# Altium PCB PCB1.PcbDoc (part 1 of 3)
Units mil, origin at the board's own origin, x right, y up, seen from the top; angles counter-clockwise.
Board outline 2406.58 x 2514.76 mil, 4 copper layers (Top Layer, GND1, GND2, Bottom Layer), stack 22.334 mil thick; 96 components, 76 nets, 372 pads, 263 vias.
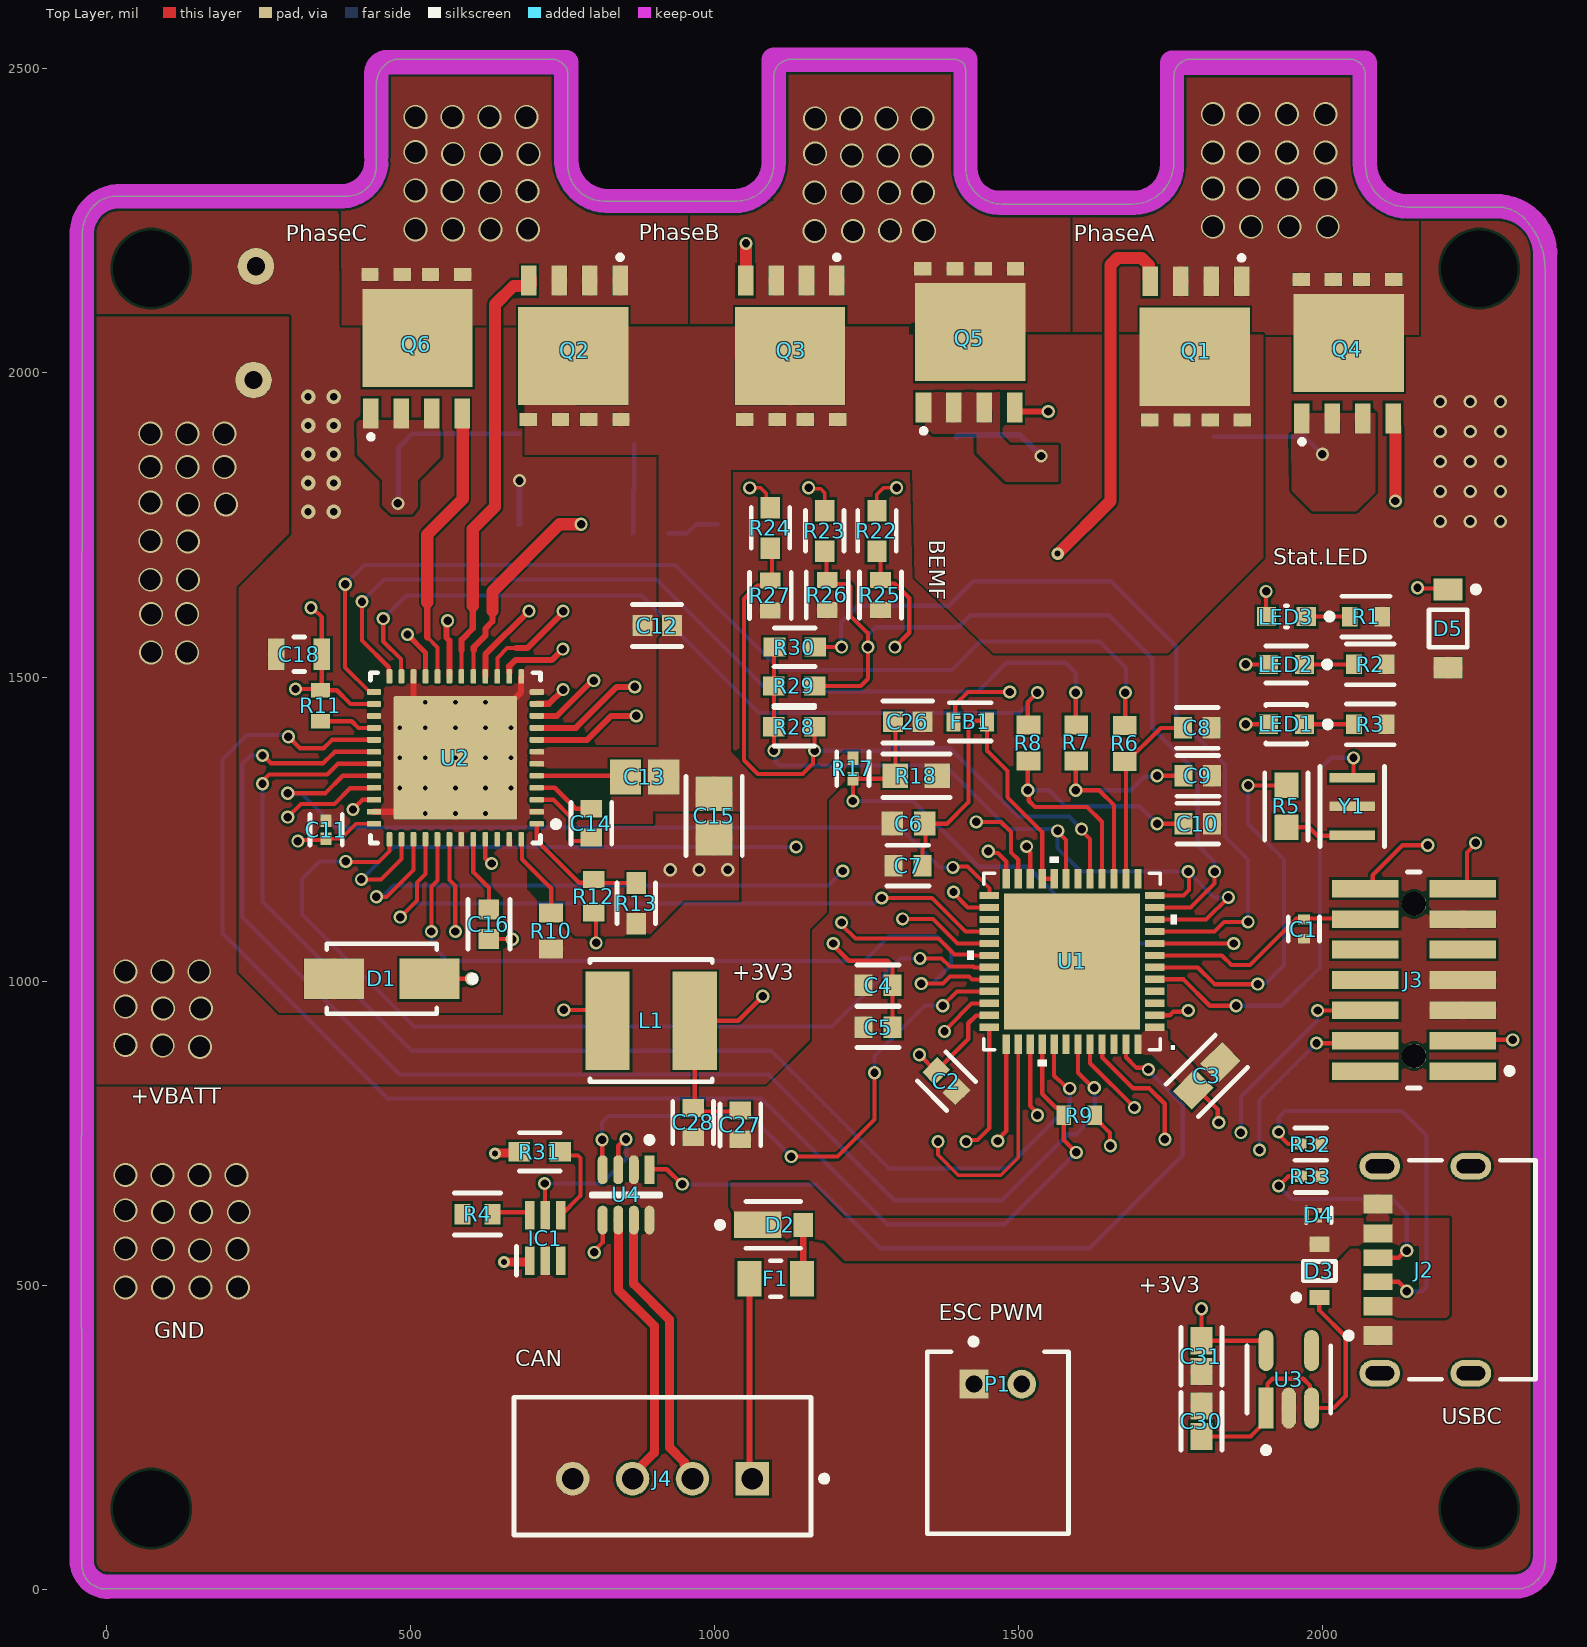
[diagram p0: Top Layer view]
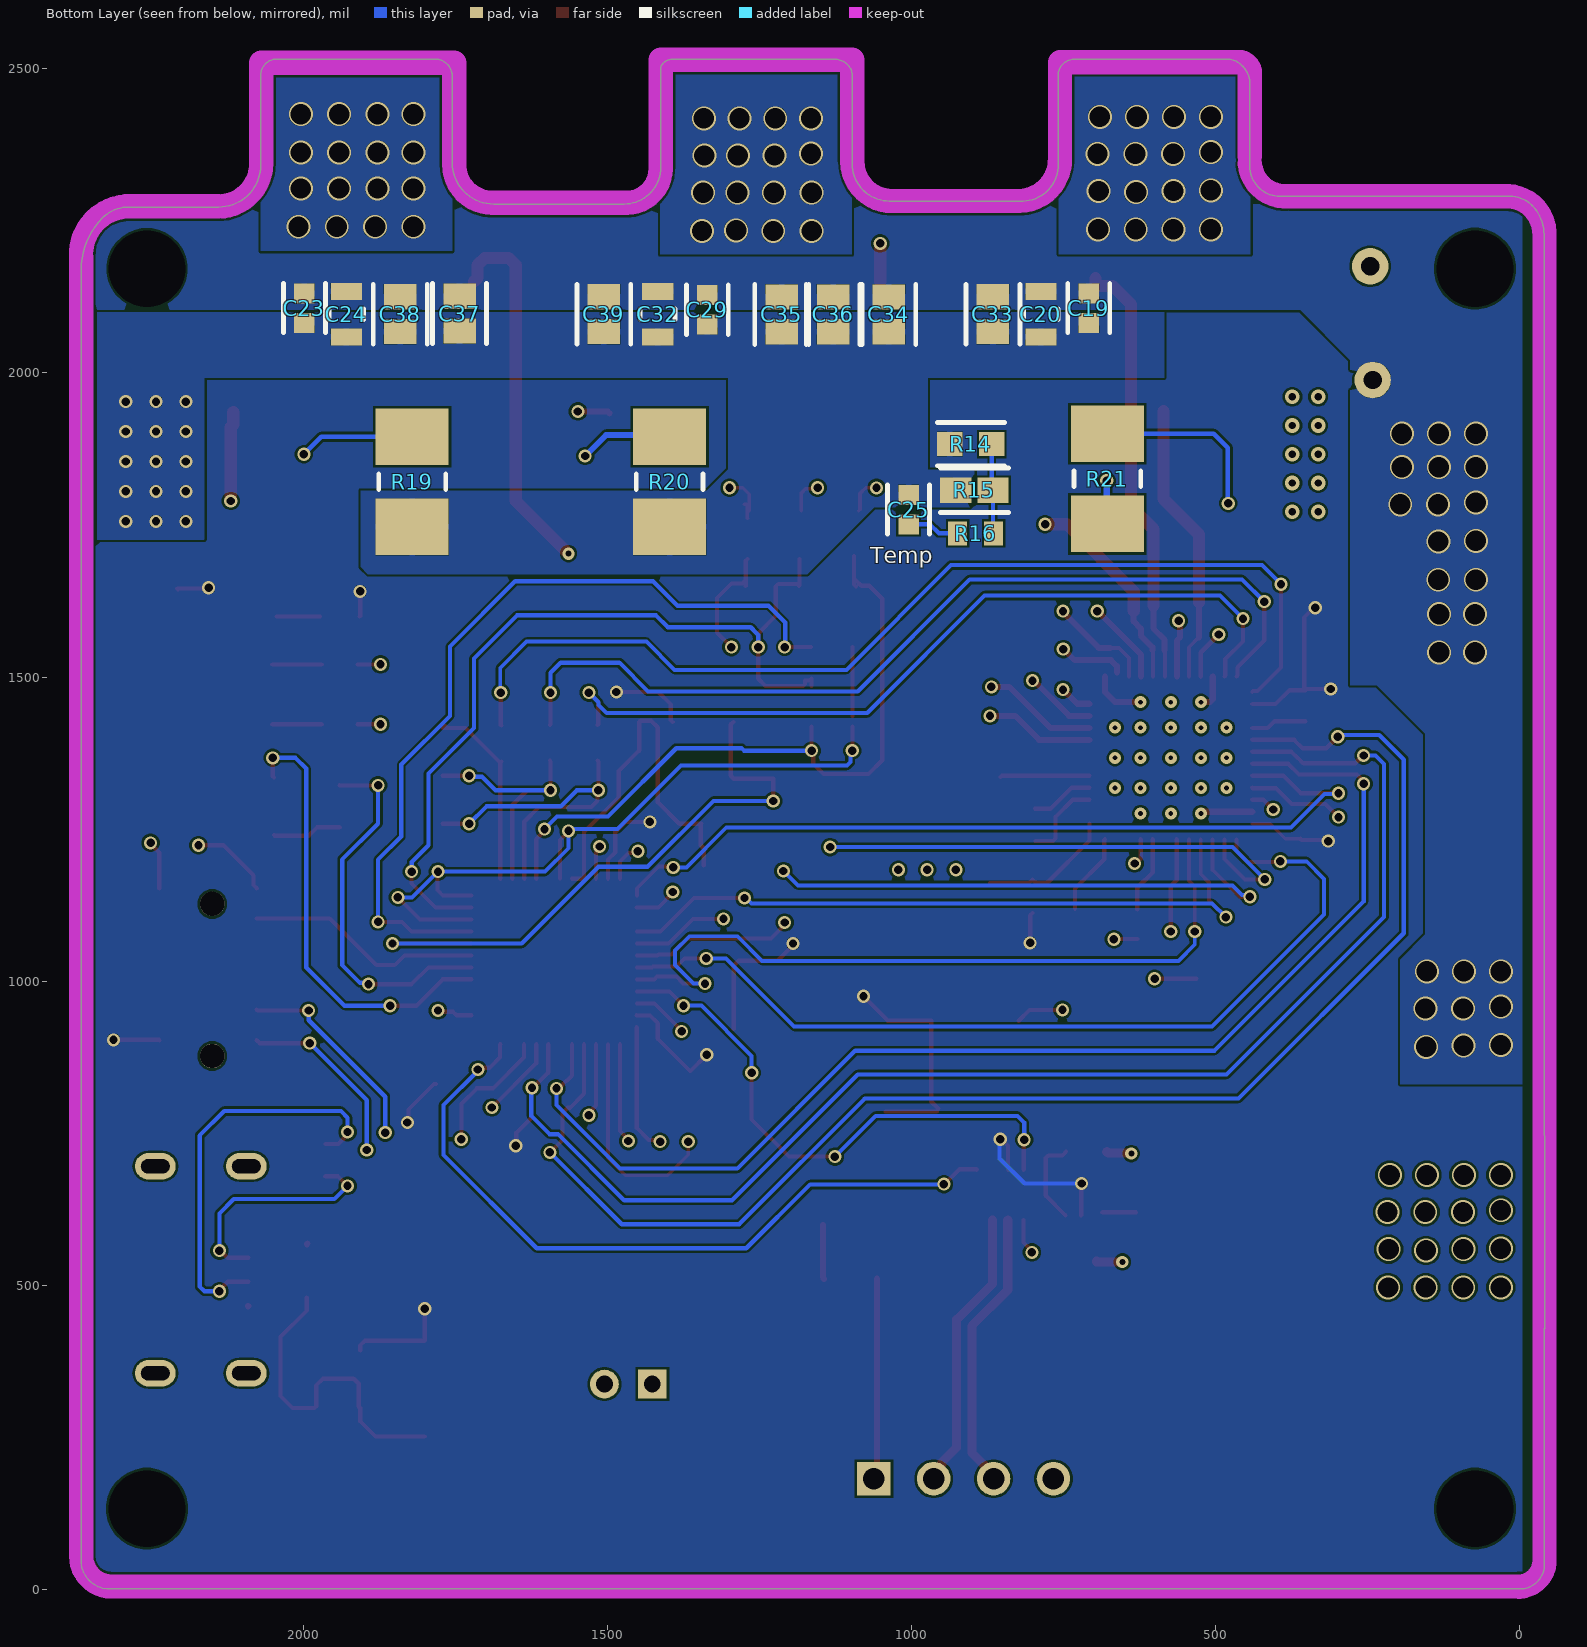
[diagram p1: Bottom Layer view, seen from below]
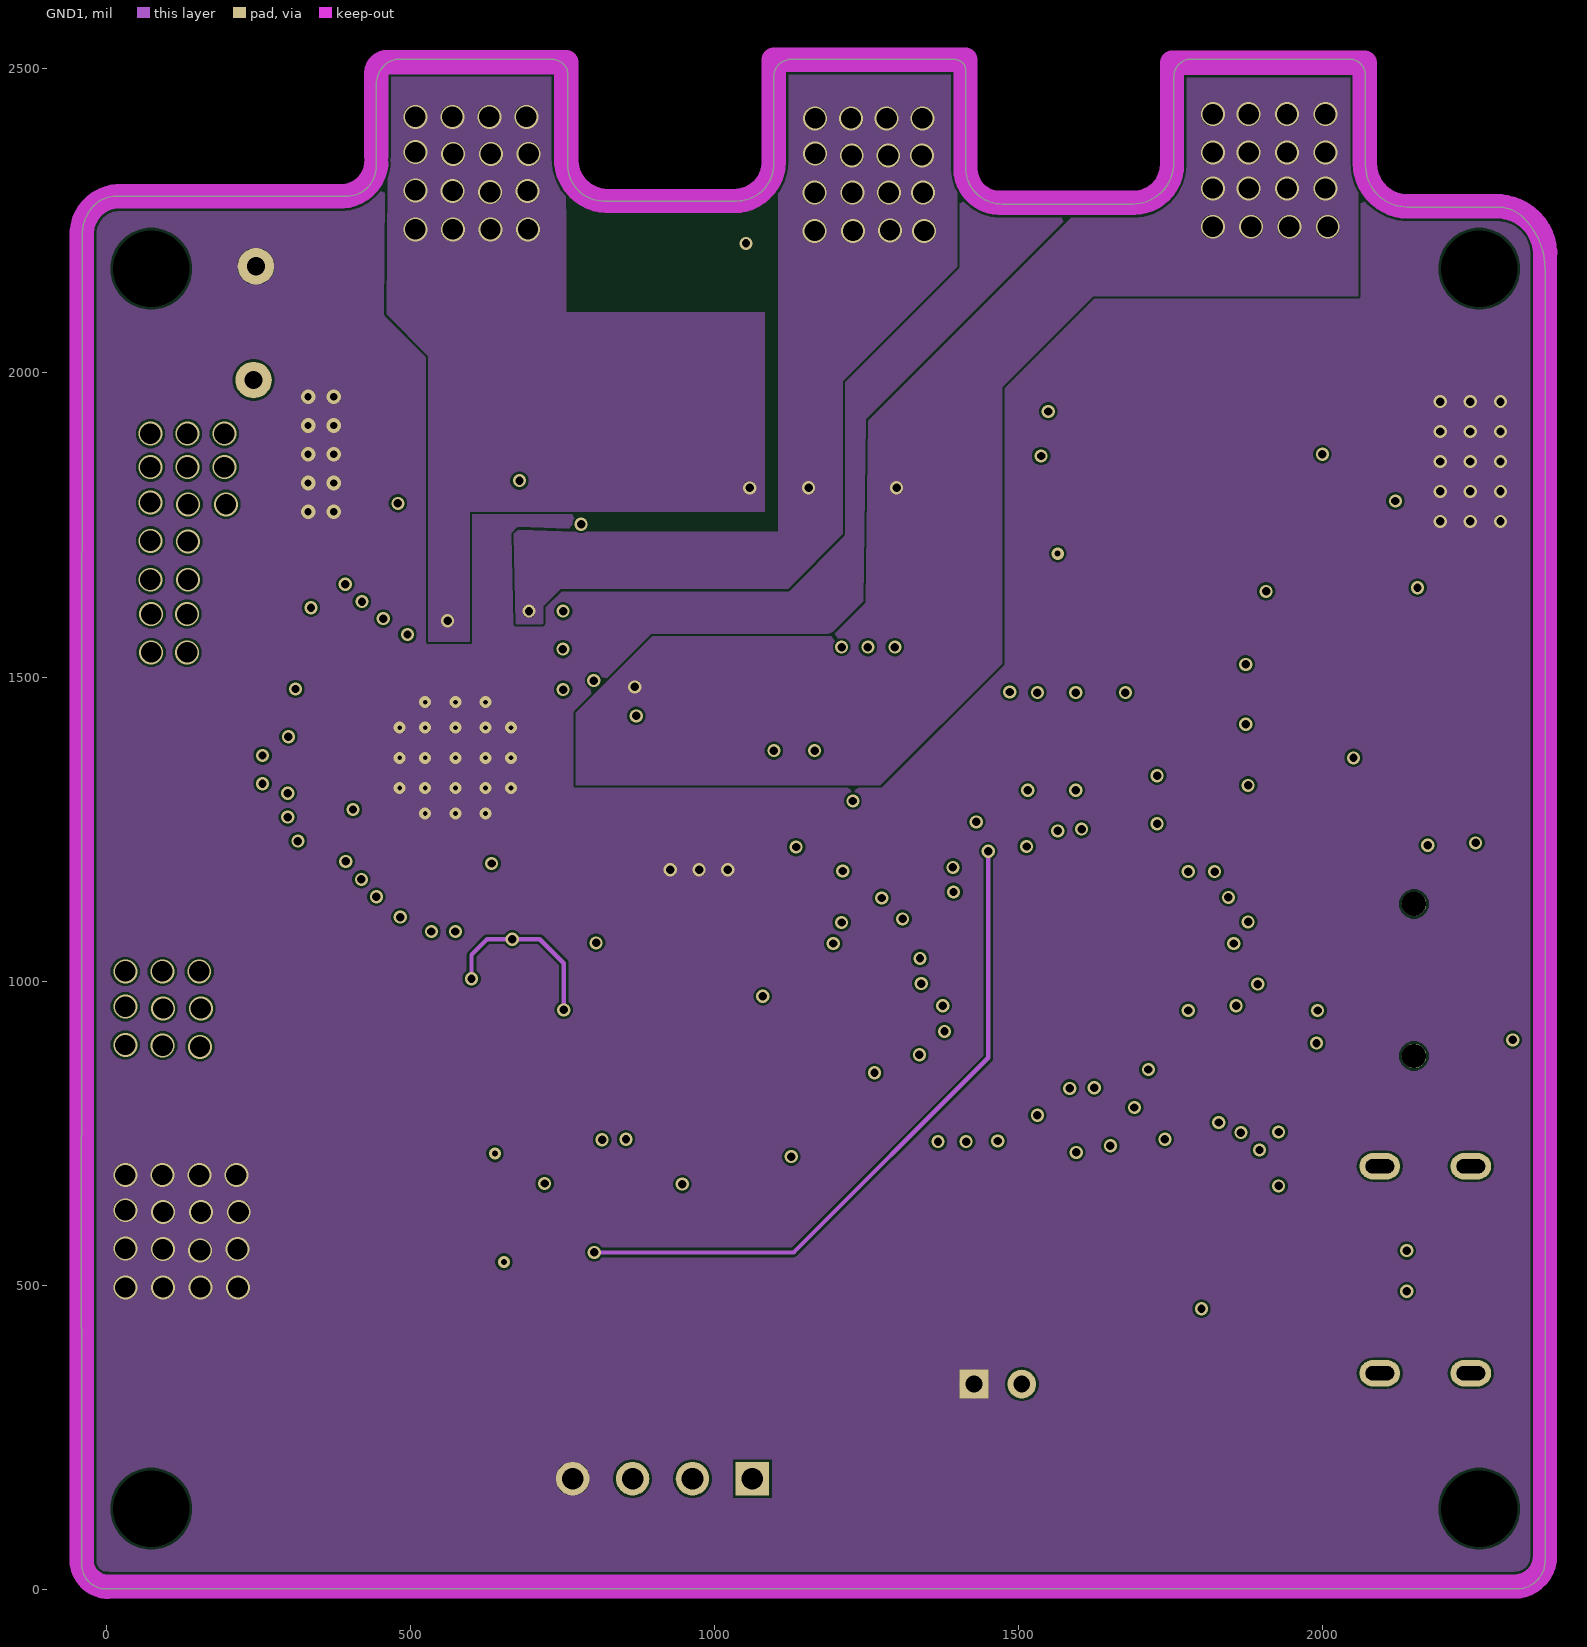
[diagram p2: GND1]
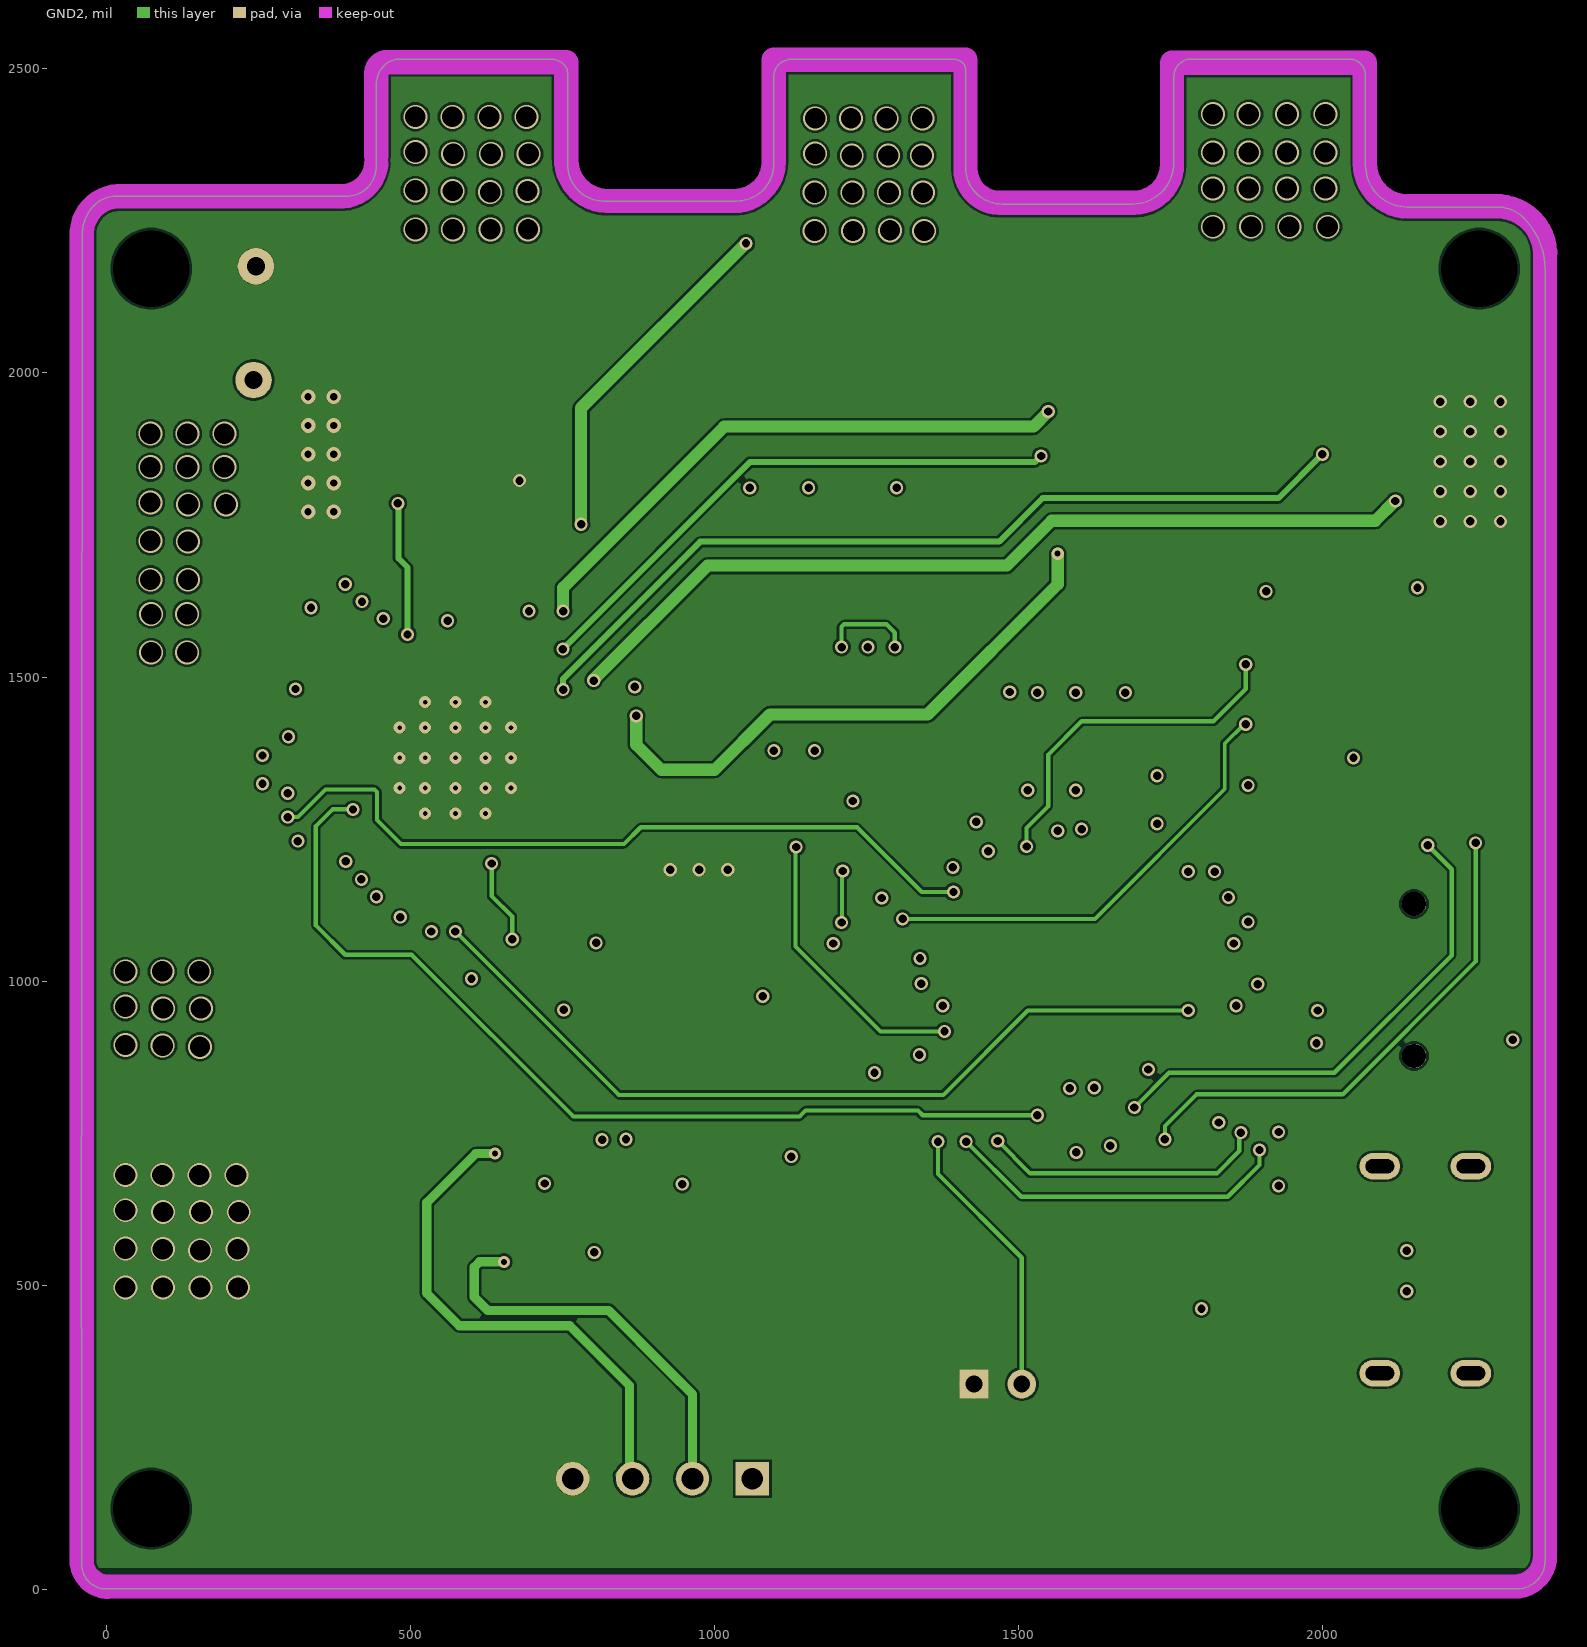
[diagram p3: GND2]

## Layer stack, top to bottom
Top Solder: solder mask 0.4, Solder Resist, Dk 3.5
Top Layer: signal copper 0.689
Dielectric 2: prepreg 2.8, PP-006, Dk 4.1
GND1: signal copper 1.378
Dielectric 1: dielectric 12.6, FR-4, Dk 4.8
GND2: signal copper 1.378
Dielectric 5: prepreg 2.8, PP-006, Dk 4.1
Bottom Layer: signal copper 0.689
Bottom Solder: solder mask 0.4, Solder Resist, Dk 3.5

## Board outline
-40.35,40.97 -40.35,429.48 -41.43,429.48 -41.13,430.75 -41.13,745.71 -40.35,747.05 -40.35,1239.17 -39.81,2173.04 -39.81,2227 cw(c28.91,2227) -19.68,2275.59 cw(c15.96,2239.95) 15.96,2290.35 394.68,2290.35 ccw(c394.68,2339.57) 443.9,2339.57 443.9,2475.42 cw(c484.22,2475.42) 455.71,2503.94 457.78,2506 cw(c481.3,2482.48) 481.3,2515.75 730.58,2515.75 cw(c730.58,2485.5) 751.97,2506.89 cw(c735.34,2490.26) 758.86,2490.26 758.86,2337.6 ccw(c817.91,2341.54) 821.85,2282.48 1036.42,2282.48 ccw(c1036.42,2343.5) 1097.44,2343.5 1097.44,2488.15 cw(c1123.68,2488.15) 1105.13,2506.7 cw(c1126.97,2484.86) 1126.97,2515.75 1381.5,2515.65 1392.07,2515.65 cw(c1392.07,2492.47) 1408.46,2508.86 cw(c1398.96,2499.35) 1412.4,2499.35 1412.4,2337.6 ccw(c1472.44,2337.6) 1472.44,2277.56 1687.01,2277.56 ccw(c1687.01,2345.47) 1754.92,2345.47 1754.92,2439.96 1754.92,2486.22 cw(c1783.46,2487.2) 1782.48,2515.75 2042.32,2515.75 cw(c2043.31,2489.17) 2069.88,2490.16 2069.88,2341.54 ccw(c2138.78,2341.54) 2138.78,2272.64 2286.84,2272.64 cw(c2286.84,2211.88) 2329.8,2254.84 cw(c2244.45,2169.49) 2365.16,2169.49 2365.16,2046.26 2365.16,176.18 2365.16,47.24 cw(c2318.9,47.24) 2318.9,0.98 -0.37,0.98 cw(c-0.37,40.97)

## Design rules (kind name [scope] priority, off if disabled: settings)
Clearance Clearance_1 [All] p1: gap=3.94 ignorepadtopadclearanceinfootprint=FALSE
Clearance "Via to Via" [All] p2: gap=3.94 ignorepadtopadclearanceinfootprint=FALSE
DiffPairsRouting [All] p1: maxlimit=10 minlimit=10 mostfreqgap=10 toplayer_minwidth=15 toplayer_maxwidth=15 toplayer_prefwidth=15 midlayer1_minwidth=15 midlayer1_maxwidth=15 midlayer1_prefwidth=15 midlayer2_minwidth=15 midlayer2_maxwidth=15 midlayer2_prefwidth=15 bottomlayer_minwidth=15 bottomlayer_maxwidth=15 bottomlayer_prefwidth=15 maxuncoupledlength=500
HoleSize [All] p1: absolutevalues=TRUE maxlimit=130 minlimit=1 maxpercent=80.000 minpercent=20.000
MinimumSolderMaskSliver [All] p1: minsoldermaskwidth=3.94
PlaneConnect [All] p1: planeconnectstyle=Direct reliefexpansion=20 reliefentries=4 reliefconductorwidth=10 reliefairgap=10
PolygonConnect PolygonConnect_GND [InNet('AGND') vs InNet('AGND')] p1: thpad.connectstyle=Relief thpad.reliefconductorwidth=10 thpad.reliefentries=4 thpad.polygonreliefangle="90 Angle" thpad.airgapwidth=10 smdpad.connectstyle=Relief smdpad.reliefconductorwidth=10 smdpad.reliefentries=4 smdpad.polygonreliefangle="90 Angle" smdpad.airgapwidth=10 via.connectstyle=Direct via.reliefconductorwidth=10 via.reliefentries=4 via.polygonreliefangle="90 Angle" via.airgapwidth=10
RoutingVias [InNet('PHASE A')  OR InNet('PHASE B') OR InNet('PHASE C')] p1: holewidth=33.46 width=39.37 viastyle="Through Hole" minholewidth=28 minwidth=30 maxholewidth=35 maxwidth=50
SilkToSolderMaskClearance [IsPad] p1: minsilkscreentomaskgap=3 clearancetoexposedcopper=TRUE
SolderMaskExpansion [All] p1: expansion=4.02 istentingtop=FALSE
SupplyNets "Schematic Supply Nets" [InNet('+VBATT')] p1: voltage=0.000
SupplyNets "Schematic Supply Nets_1" [InNet('GND')] p2: voltage=0.000
SupplyNets "Schematic Supply Nets_4" [InNet('+3V3')] p3: voltage=0.000
Width "Gate Drive Signal_2" [(InNet('SPA') OR InNet('SPB') OR InNet('SPC'))] p1: maxlimit=10 minlimit=6 preferedwidth=8
Width VBus [InNet('VBUS')] p2: maxlimit=30 minlimit=10 preferedwidth=20
Width "Gate Drive Signal Width" [(InNet('GHA') OR InNet('GLA') OR InNet('GHB') OR InNet('GLB') OR InNet('GHC') OR InNet('GLC'))] p3: maxlimit=22 minlimit=6 preferedwidth=20 minimp=50.000000 maximp=50.000000 favimp=50.000000
Width "Signal Widths" [(InNet('CAN_TX') OR InNet('CAN_RX') OR InNet('GPIO PB11') OR InNet('GPIO PB13') OR InNet('GPIO PC10') OR InNet('GPIO PA6') OR InNet('SCLK') OR InNet('SDI') OR InNet('SDO') OR InNet('GPIO PB12') OR InNet('ESC PWM/TIM2_CH1') OR InNet('SWCLK') OR InNet('SWDIO') OR InNet('ADC1 IN2 / COMP1 INP') OR InNet('ADC1 IN4 / COMP2 INP') OR InNet('ADC1 IN15 / COMP4 INP') OR InNet('ADC1 IN3/COMP2 INM') OR InNet('SOA') OR InNet('SOB') OR InNet('SOC') OR InNet('VBUS Sense') OR InNet('Therm') OR InNet('TIM1 CH1') OR InNet('TIM1 CH2') OR InNet('TIM1 CH3') OR InNet('TIM1 CH1N') OR InNet('TIM1 CH2N') OR InNet('TIM1 CH3N') OR InNet('UART1 RX') OR InNet('UART1 TX') OR InNet('STATUS1') OR InNet('STATUS2') Or InNet('ESC_NRST') OR InNet('+3V3'))] p4: maxlimit=10 minlimit=5.5 preferedwidth=7
25 further rules are at their usual default settings.

## Classes and differential pairs
component class USB: C30 C31 D3 D4 J2 R32 R33 U3
component class "Gate Drive": C11 C12 C13 C14 C15 C16 C18 C19 C20 C23 C24 C29 C32 D1 L1 Q1 Q2 Q3 Q4 Q5 Q6 R9 R10 R11 R12 R13 R19 R20 R21 U2
component class Sensors: C25 C26 R14 R15 R16 R17 R18 R22 R23 R24 R25 R26 R27 R28 R29 R30
component class MCU: C1 C2 C3 C4 C5 C6 C7 C8 C9 C10 C33 C34 C35 C36 C37 C38 C39 D5 FB1 J1 J3 LED1 LED2 LED3 P1 R1 R2 R3 R4 R5 R6 R7 R8 U1 Y1
component class CAN: C27 C28 D2 F1 IC1 IC? J4 R31 U4
differential pair CAN: +CAN_P -CAN_N

## Components (designator, comment, footprint, x,y, rotation, side; value= is the part's Value field where it differs from the comment)
C1 "100nF 0402" FP-GRM155-0_05-MFG 1968.5,1085.63 r270 top
C2 "0.1uF 25V X7R 0603" FP-C0603C-CF-MFG 1380.91,835.63 r315 top value="0.10 μF"
C3 "4.7uF 16V X7R 0603" FP-GRM188-0_2-IPC_A 1809.06,844.49 r45 top
C4 "0.1uF 25V X7R 0603" FP-C0603C-CF-MFG 1268.7,993.11 r180 top value="0.10 μF"
C5 "0.1uF 25V X7R 0603" FP-C0603C-CF-MFG 1268.7,924.21 r180 top value="0.10 μF"
C6 "1uF X7R 25V 0603" CAPC1608X95X35NL15T15 1318.9,1258.86 r0 top
C7 "10nF C0G 25V 0603" FP-C0603C-CF-MFG 1317.91,1189.96 r180 top value="10,000 pF"
C8 "1nF 50V X7R 0603" FP-C0603C-CF-MFG 1793.31,1416.34 r0 top value="1,000 pF"
C9 "1nF 50V X7R 0603" FP-C0603C-CF-MFG 1794.29,1337.6 r0 top value="1,000 pF"
C10 "1nF 50V X7R 0603" FP-C0603C-CF-MFG 1794.29,1258.86 r180 top value="1,000 pF"
C11 "1uF X7R 6.3V 0402" FP-GRT155-0_05-IPC_C 361.22,1249.02 r270 top
C12 "0.1uF X7R 50V 0603" FP-0603B104K500CT-IPC_C 905.51,1584.65 r0 top
C13 "1uF X7R 16 V 0805" CAPC2013X140X50NL20T25 884.84,1335.63 r180 top
C14 "47nF X7R 25V 0603" FP-C0603C-CF-MFG 797.24,1259.84 r270 top value="47,000 pF"
C15 "10uF X5R 50V 0805" FP-GRM21B-0_2-e0_2_0_7-IPC_A 999.09,1271.71 r270 top
C16 "0.1uF X7R 50V 0603" FP-0603B104K500CT-IPC_C 628.94,1093.5 r270 top
C18 "22uF X7R 10V 0805" FP-GRM21B-0_2-e0_2_0_7-MFG 316.93,1537.4 r180 top
C19 "0.1uF X7R 50V 0603" FP-0603B104K500CT-IPC_C 708.66,2106.3 r270 bottom
C20 "4.7uF X7R 50V 0805" FP-GRM21B-0_2-e0_2_0_7-MFG 787.4,2096.46 r270 bottom
C23 "0.1uF X7R 50V 0603" FP-0603B104K500CT-IPC_C 1998.03,2106.3 r270 bottom
C24 "4.7uF X7R 50V 0805" FP-GRM21B-0_2-e0_2_0_7-MFG 1929.13,2096.46 r270 bottom
C25 "0.1uF X7R 50V 0603" FP-0603B104K500CT-IPC_C 1004.92,1775.15 r270 bottom
C26 "0.1uF X7R 50V 0603" FP-0603B104K500CT-IPC_C 1317.37,1426.18 r180 top
C27 "0.1uF 25V X7R 0603" FP-C0603C-CF-MFG 1042.32,763.78 r270 top value="0.10 μF"
C28 "0.1uF 25V X7R 0603" FP-C0603C-CF-MFG 964.57,767.72 r270 top value="0.10 μF"
C29 "0.1uF X7R 50V 0603" FP-0603B104K500CT-IPC_C 1335.75,2103.67 r270 bottom
C30 "C1608X5R1H105K080AB" FP-C1608-080-0_1-IPC_B 1800.2,276.57 r270 top
C31 "C1608X5R1H105K080AB" FP-C1608-080-0_1-IPC_B 1800.2,383.62 r90 top
C32 "4.7uF X7R 50V 0805" FP-GRM21B-0_2-e0_2_0_7-MFG 1417.32,2096.46 r270 bottom
C33 "4.7uF X7R 50V 0805" FP-GRM21B-0_2-e0_2_0_7-IPC_C 866.14,2096.46 r270 bottom
C34 "4.7uF X7R 50V 0805" FP-GRM21B-0_2-e0_2_0_7-IPC_C 1037.28,2096.15 r270 bottom
C35 "4.7uF X7R 50V 0805" FP-GRM21B-0_2-e0_2_0_7-IPC_C 1213.46,2096.15 r270 bottom
C36 "4.7uF X7R 50V 0805" FP-GRM21B-0_2-e0_2_0_7-IPC_C 1128.81,2096.15 r270 bottom
C37 "4.7uF X7R 50V 0805" FP-GRM21B-0_2-e0_2_0_7-IPC_C 1743.11,2097.32 r270 bottom
C38 "4.7uF X7R 50V 0805" FP-GRM21B-0_2-e0_2_0_7-IPC_C 1840.55,2096.46 r270 bottom
C39 "4.7uF X7R 50V 0805" FP-GRM21B-0_2-e0_2_0_7-IPC_C 1505.91,2096.46 r270 bottom
D1 "60V 1A" FP-SMA-MFG 452.76,1003.94 r180 top
D2 "NRVBSS16HE" FP-477AD-MFG 1096.46,599.41 r0 top
D3 "NSR0320MW2T1G" ONSC-SOD-323-2-477-02_V 1994.09,523.62 r90 top
D4 "PESD3V3Y1BSFYL" FP-SOD962-2-CA-MFG 1993.11,615.08 r270 top
D5 "MMSZ4685T1G" ONSC-SOD-123-2-425-04_V 2205.71,1579.72 r270 top
F1 "300mA" FP-0805L010-MFG 1100.39,510.83 r0 top
FB1 "600@100MHz" FP-MPZ1608-0_8-MFG 1420.28,1426.18 r180 top
IC1 "74LVC1G3157GW-Q10H" SOT65P210X110-6N 721.54,577.6 r90 top
J2 "217175-0001" FP-217175-0001-MFG 2209.65,525.59 r90 top
J3 "FTSH-107-01-L-DV-K-A" FP-FTSH-107-01-L-DV-K-A-MFG 2149.61,1001.97 r90 top
J4 "B4B-XH-A(LF)(SN)" FP-B4B-XH-A_LF_SN-MFG 914.37,202.76 r0 top
L1 "22μH 1500mA 2020" FP-LQH5BPN_38-MFG 895.67,935.04 r0 top
LED1 "ORANGE" FP-6_541-5092_01-4-MFG 1939.96,1422.24 r180 top
LED2 "GREEN" FP-LTST-C193KGKT-5A-MFG 1939.96,1520.67 r180 top
LED3 "BLUE" FP-APT1608QBC-D-MFG 1939.96,1599.41 r180 top
P1 "S2B-PH-K-S(LF)(SN)" JST-S2B-PH-K-S_V 1465.55,241.14 r0 top
Q1 "STL130N6F7" FERD20U50DJFTR 1787.4,2153.54 r180 top
Q2 "STL130N6F7" FERD20U50DJFTR 765.75,2154.53 r180 top
Q3 "STL130N6F7" FERD20U50DJFTR 1122.05,2154.53 r180 top
Q4 "STL130N6F7" FERD20U50DJFTR 2044.29,1922.24 r0 top
Q5 "STL130N6F7" FERD20U50DJFTR 1422.24,1939.96 r0 top
Q6 "STL130N6F7" FERD20U50DJFTR 513.78,1930.12 r0 top
R1 "330 O 5% 0603" FP-AC0603-IPC_C 2070.8,1599.41 r180 top
R2 "AC0603JR-07330RL" FP-AC0603-IPC_C 2077.76,1520.67 r180 top
R3 "AC0603JR-07330RL" FP-AC0603-IPC_C 2077.76,1422.24 r180 top
R4 "0 O 0603" FP-MCT0603-IPC_C 610.24,617.13 r0 top
R5 "220 O 1% 0603" FP-AC0603-IPC_A 1939.96,1287.4 r270 top
R6 "100 O 0603 1%" RESC1608X55X25ML10T15 1674.21,1390.75 r90 top
R7 "100 O 0603 1%" RESC1608X55X25ML10T15 1594.49,1391.73 r90 top
R8 "100 O 0603 1%" RESC1608X55X25ML10T15 1515.75,1391.73 r90 top
R9 "10kO 5% 0603" RESC1608X55X25LL10T15 1599.41,779.53 r0 top
R10 "100kO 1% 0603" RESC1608X55X25ML10T15 731.3,1082.68 r270 top
R11 "10kO 5% 0603" RESC1608X55X25LL10T15 352.36,1452.76 r90 top
R12 "33.2k 1% 0603" RESC1608X55X25NL10T15 801.18,1139.76 r270 top
R13 "10kO 0.1% 0603" FP-RT0603-MFG 871.06,1127.95 r90 top value=10KΩ
R14 "10kO 5% 0603" FP-AC0603-IPC_A 902.56,1882.87 r0 bottom
R15 "NTC 10kO 1% 0603" FP-NCP18-0_15-IPC_A 896.65,1807.09 r180 bottom
R16 "100 O 0603 1%" RESC1608X55X25ML10T15 894.68,1736.22 r180 bottom
R17 "100kO 1% 0402" FP-CRGP0402-IPC_C 1227.36,1349.41 r90 top value=100KΩ
R18 "10kO 5% 0603" FP-AC0603-IPC_A 1331.69,1337.6 r180 top
R19 "0.001 Ohm 2010" FP-WSL2010-1_47-MFG 1820.87,1820.87 r90 bottom
R20 "0.001 Ohm 2010" FP-WSL2010-1_47-MFG 1397.64,1820.87 r90 bottom
R21 "0.001 Ohm 2010" FP-WSL2010-1_47-MFG 678.15,1825.79 r90 bottom
R22 "100kO 1% 0603" FP-RT0603-MFG 1266.73,1740.16 r90 top value=100KΩ
R23 "100kO 1% 0603" FP-RT0603-MFG 1181.1,1740.16 r90 top value=100KΩ
R24 "100kO 1% 0603" FP-RT0603-MFG 1091.54,1745.08 r90 top value=100KΩ
R25 "10kO 1% 0603" FP-MCT0603-IPC_C 1272.64,1634.84 r90 top
R26 "10kO 1% 0603" FP-MCT0603-IPC_C 1185.04,1634.84 r90 top
R27 "10kO 1% 0603" FP-MCT0603-IPC_C 1091.54,1634.03 r90 top
R28 "100kO 1% 0603" FP-RT0603-MFG 1130.91,1418.31 r0 top value=100KΩ
R29 "100kO 1% 0603" FP-RT0603-MFG 1130.91,1485.24 r0 top value=100KΩ
R30 "100kO 1% 0603" FP-RT0603-MFG 1131.89,1549.21 r0 top value=100KΩ
R31 "120 O 0.1% 0603" FP-RT0603-MFG 712.6,719.49 r0 top value=120Ω
R32 "RN73R1ETTP5101F25" FP-RN73R1E-IPC_C 1979.89,732.28 r0 top
R33 "RN73R1ETTP5101F25" FP-RN73R1E-IPC_C 1980.32,679.13 r0 top
U1 "STM32G431CBU6" UFQFPN-48_7X7X0P55MM 1587.6,1032.48 r180 top
U2 "DRV8323RSRGZR" FP-RGZ0048A-MFG 573.82,1367.13 r180 top
U3 "AP2112K-3.3TRG1" FP-SOT25-IPC_A 1943.9,345.45 r90 top
U4 "TCAN334DCNR" FP-DCN0008A-IPC_C 854.33,648.62 r270 top
Y1 "8MHz" FP-CSTNE8M00GH5C000R0-MFG 2048.23,1287.4 r270 top

## Footprints (in the part's own frame and the unit in brackets; to place one, negate y for a bottom-side part, rotate by r counter-clockwise, add the part's x,y. Pads: shape width x height; smd on the part's side, far side on the other; paste and mask are expansions set on the pad)
CAPC1608X95X35NL15T15 [mm] "Chip Capacitor, 2-Leads, Body 1.60x0.80mm, IPC Medium Density"
  rect 0.9x1 smd: 1(-0.675,0) 2(0.675,0)
  body extent -0.87,-0.48 0.87,0.47, height 0.95
CAPC2013X140X50NL20T25 [mm] "Chip Capacitor, 2-Leads, Body 2.00x1.25mm, IPC Medium Density"
  rect 1.3x1.45 smd: 1(-0.8,0) 2(0.8,0)
  body extent -1.1,-0.72 1.1,0.72, height 1.4
FERD20U50DJFTR [mm]
  rect 0.65x1.25 smd: 1(-2.005,0.075) 2(-0.735,0.075) 3(0.535,0.075) 4(1.805,0.075)
  rect 4.6x4.1 smd: 5(-0.05,3.225)
  rect 0.725x0.55 smd: 6(-2.038,5.875) 7(-0.688,5.875) 8(0.487,5.875) 9(1.837,5.875)
  silkscreen extent -2.1,-1 -1.9,-0.8, body extent -2.65,-0.18 2.55,5.97, height 1
FP-6_541-5092_01-4-MFG [mm]
  rect 0.8x0.8 smd paste+0 mask+0: 1(-0.75,0) 2(0.75,0)
  silkscreen extent -1.85,-0.82 0.85,0.82, body extent -1.25,-0.55 1.25,0.55, height 0.25
FP-477AD-MFG [mm]
  rect 2x1.1 smd paste+0 mask+0: 1(-0.65,0)
  rect 0.8x1 smd paste+0 mask+0: 2(1.25,0)
  silkscreen extent -2.35,-0.97 1.15,0.97, body extent -1.75,-0.8 1.75,0.8, height 0.25
FP-0603B104K500CT-IPC_C [mil]
  rect 32.77x33.85 smd paste+0 mask+0: 1(-24.16,0) 2(24.16,0)
  silkscreen extent -41,-34 41,34, body extent -44,-23 44,23, height 10
FP-0805L010-MFG [mm]
  rect 1x1.5 smd paste+0 mask+0: 1(-1.1,0) 2(1.1,0)
  silkscreen extent -0.23,-0.75 0.23,0.75, body extent -1.7,-0.85 1.7,0.85, height 0.25
FP-217175-0001-MFG [mm]
  rrect100% 1.1x1.7 hole 1.2 slot 0.6 at 0 deg paste-2539.97 mask+0: 1(-4.32,2.95) 2(4.32,2.95) 3(-4.32,-0.85) 4(4.32,-0.85)
  rect 0.7x1.2 smd paste+0 mask+0: A5(-0.5,3.03) B5(0.5,3.03)
  rect 0.76x1.2 smd paste+0 mask+0: A9(1.52,3.03) B9(-1.52,3.03)
  rect 0.8x1.2 smd paste+0 mask+0: A12(2.75,3.03) B12(-2.75,3.03)
  silkscreen extent -4.57,-3.55 4.57,4.37, body extent -4.97,-3.65 4.97,3.9, height 0.25
FP-AC0603-IPC_A [mil]
  rect 41.68x39.85 smd paste+0 mask+0: 1(-34.52,0) 2(34.52,0)
  silkscreen extent -55,-36 55,36, body extent -75,-40 75,40, height 10
FP-AC0603-IPC_C [mil]
  rect 25.93x31.97 smd paste+0 mask+0: 1(-26.64,0) 2(26.64,0)
  silkscreen extent -40,-33 40,33, body extent -44,-22 44,22, height 10
FP-APT1608QBC-D-MFG [mm]
  rect 0.8x0.8 smd paste+0 mask+0: 1(-0.825,0) 2(0.825,0)
  silkscreen extent -1.92,-0.45 0.05,0.45, body extent -1.33,-0.55 1.33,0.55, height 0.25
FP-B4B-XH-A_LF_SN-MFG [mm]
  rect 1.4x1.4 hole 0.9 paste-2539.97 mask+0: 1(3.75,-0.525)
  round 1.4 hole 0.9 paste-2539.97 mask+0: 2(1.25,-0.525) 3(-1.25,-0.525) 4(-3.75,-0.525)
  silkscreen extent -6.2,-2.88 6.88,2.88, body extent -6.3,-2.98 6.3,2.98, height 0.25
FP-C0603C-CF-MFG [mm]
  rect 0.75x0.9 smd paste+0 mask+0: 1(-0.6,0) 2(0.6,0)
  silkscreen extent -0.87,-0.85 0.88,0.85, body extent -1.2,-0.6 1.2,0.6, height 0.25
FP-C1608-080-0_1-IPC_B [mil]
  rect 44.53x35.91 smd paste+0 mask+0: 1(-25.22,0) 2(25.22,0)
  silkscreen extent -47,-34 47,34, body extent -57,-28 57,28, height 10
FP-CRGP0402-IPC_C [mil]
  rect 22.03x18.6 smd paste+0 mask+0: 1(-16.78,0) 2(16.78,0)
  silkscreen extent -28,-27 28,27, body extent -32,-15 32,15, height 10
FP-CSTNE8M00GH5C000R0-MFG [mm]
  rect 0.4x1.9 smd paste+0 mask+0: 1(1.2,0) 2(0,0) 3(-1.2,0)
  silkscreen extent -1.68,-1.35 1.68,1.35, body extent -1.78,-1.05 1.78,1.05, height 0.25
FP-DCN0008A-IPC_C [mm]
  rect 1.205x0.415 smd paste+0 mask+0: 1(-1.05,0.975)
  rrect100% 1.205x0.415 smd paste+0 mask+0: 2(-1.05,0.325) 3(-1.05,-0.325) 4(-1.05,-0.975) 5(1.05,-0.975) 6(1.05,-0.325) 7(1.05,0.325) 8(1.05,0.975)
  silkscreen extent -2.42,-1.45 0.05,1.45, body extent -1.75,-1.55 1.75,1.55, height 0.25
FP-FTSH-107-01-L-DV-K-A-MFG [mm]
  rect 0.74x2.79 smd paste+0 mask+0: 1(-3.81,-2.035) 2(-3.81,2.035) 3(-2.54,-2.035) 4(-2.54,2.035) 5(-1.27,-2.035) 6(-1.27,2.035) 7(0,-2.035) 8(0,2.035) 9(1.27,-2.035) 10(1.27,2.035) 11(2.54,-2.035) 12(2.54,2.035) 13(3.81,-2.035) 14(3.81,2.035)
  round 1.02 hole 1.02 unplated paste-2539.97 mask+0: ""(-3.175,0) ""(3.175,0)
  silkscreen extent -4.51,-4.12 4.51,0.27, body extent -4.61,-3.53 4.61,3.53, height 0.25
FP-GRM21B-0_2-e0_2_0_7-IPC_A [mil]
  rect 57.27x61.27 smd paste+0 mask+0: 1(-36.45,0) 2(36.45,0)
  silkscreen extent -65,-46 65,46, body extent -85,-50 85,50, height 10
FP-GRM21B-0_2-e0_2_0_7-IPC_C [mil]
  rect 41.52x53.39 smd paste+0 mask+0: 1(-28.57,0) 2(28.57,0)
  silkscreen extent -49,-44 49,44, body extent -39,-25 39,25, height 57
FP-GRM21B-0_2-e0_2_0_7-MFG [mm]
  rect 0.7x1.3 smd paste+0 mask+0: 1(-0.95,0) 2(0.95,0)
  silkscreen extent -0.23,-0.72 0.23,0.72, body extent -1.4,-0.82 1.4,0.82, height 0.25
FP-GRM155-0_05-MFG [mm]
  rect 0.4x0.5 smd paste+0 mask+0: 1(-0.4,0) 2(0.4,0)
  silkscreen extent -0.5,-0.65 0.5,0.65, body extent -0.7,-0.38 0.7,0.38, height 0.25
FP-GRM188-0_2-IPC_A [mil]
  rect 51.38x43.55 smd paste+0 mask+0: 1(-31.52,0) 2(31.52,0)
  silkscreen extent -57,-38 57,38, body extent -77,-41 77,41, height 10
FP-GRT155-0_05-IPC_C [mil]
  rect 20.29x18.6 smd paste+0 mask+0: 1(-14.9,0) 2(14.9,0)
  silkscreen extent -25,-27 25,27, body extent -29,-15 29,15, height 10
FP-LQH5BPN_38-MFG [mm]
  rect 1.85x4.1 smd paste+0 mask+0: 1(-1.825,0) 2(1.825,0)
  silkscreen extent -2.55,-2.55 2.55,2.55, body extent -2.85,-2.65 2.85,2.65, height 0.25
FP-LTST-C193KGKT-5A-MFG [mm]
  rect 0.8x0.8 smd paste+0 mask+0: 1(-0.75,0) 2(0.75,0)
  silkscreen extent -1.83,-0.77 0.85,0.77, body extent -1.25,-0.55 1.25,0.55, height 0.25
FP-MCT0603-IPC_C [mil]
  rect 26.13x33.94 smd paste+0 mask+0: 1(-24.78,0) 2(24.78,0)
  silkscreen extent -38,-34 38,34, body extent -42,-23 42,23, height 10
FP-MPZ1608-0_8-MFG [mm]
  rect 0.6x0.8 smd paste+0 mask+0: 1(-0.7,0) 2(0.7,0)
  silkscreen extent -0.87,-0.8 0.87,0.8, body extent -1.1,-0.58 1.1,0.58, height 0.25
FP-NCP18-0_15-IPC_A [mil]
  rect 51.42x41.66 smd paste+0 mask+0: 1(-30.55,0) 2(30.55,0)
  silkscreen extent -56,-37 56,37, body extent -31,-16 31,16, height 37
FP-RGZ0048A-MFG [mm]
  rrect42% 0.6x0.24 smd paste+0 mask+0: 1(-3.4,2.75) 2(-3.4,2.25) 3(-3.4,1.75) 4(-3.4,1.25) 5(-3.4,0.75) 6(-3.4,0.25) 7(-3.4,-0.25) 8(-3.4,-0.75) 9(-3.4,-1.25) 10(-3.4,-1.75) 11(-3.4,-2.25) 12(-3.4,-2.75) 25(3.4,-2.75) 26(3.4,-2.25) 27(3.4,-1.75) 28(3.4,-1.25) 29(3.4,-0.75) 30(3.4,-0.25) 31(3.4,0.25) 32(3.4,0.75) 33(3.4,1.25) 34(3.4,1.75) 35(3.4,2.25) 36(3.4,2.75)
  rrect42% 0.24x0.6 smd paste+0 mask+0: 13(-2.75,-3.4) 14(-2.25,-3.4) 15(-1.75,-3.4) 16(-1.25,-3.4) 17(-0.75,-3.4) 18(-0.25,-3.4) 19(0.25,-3.4) 20(0.75,-3.4) 21(1.25,-3.4) 22(1.75,-3.4) 23(2.25,-3.4) 24(2.75,-3.4) 37(2.75,3.4) 38(2.25,3.4) 39(1.75,3.4) 40(1.25,3.4) 41(0.75,3.4) 42(0.25,3.4) 43(-0.25,3.4) 44(-0.75,3.4) 45(-1.25,3.4) 46(-1.75,3.4) 47(-2.25,3.4) 48(-2.75,3.4)
  rrect2% 5.15x5.15 smd paste-1000 mask+0: 49(0,0)
  silkscreen extent -4.33,-3.55 3.55,3.55, body extent -3.8,-3.8 3.8,3.8, height 0.25
FP-RN73R1E-IPC_C [mil]
  rect 19.2x18.6 smd paste+0 mask+0: 1(-16.3,0) 2(16.3,0)
  silkscreen extent -26,-27 26,27, body extent -30,-15 30,15, height 10
FP-RT0603-MFG [mm]
  rect 0.9x0.8 smd paste+0 mask+0: 1(-0.85,0) 2(0.85,0)
  silkscreen extent -0.85,-0.81 0.86,0.8, body extent -1.4,-0.55 1.4,0.55, height 0.25
FP-SMA-MFG [mm]
  rect 2.5x1.7 smd paste+0 mask+0: 1(-2,0) 2(2,0)
  silkscreen extent -3.93,-1.46 2.3,1.46, body extent -3.35,-1.56 3.35,1.56, height 0.25
FP-SOD962-2-CA-MFG [mm]
  rect 0.2x0.28 smd paste-1000 mask-1000: 1(-0.2,0) 2(0.2,0)
  silkscreen extent -0.31,-0.53 0.31,0.53, body extent -0.43,-0.26 0.43,0.26, height 0.25
FP-SOT25-IPC_A [mm]
  rect 1.707x0.616 smd paste+0 mask+0: 1(-1.201,0.95)
  rrect100% 1.707x0.616 smd paste+0 mask+0: 2(-1.201,0) 3(-1.201,-0.95) 4(1.201,-0.95) 5(1.201,0.95)
  silkscreen extent -3.08,-1.75 1.4,1.75, body extent -2.55,-2 2.55,2, height 0.25
FP-WSL2010-1_47-MFG [mm]
  rect 2.36x3.05 smd paste+0 mask+0: 1(-1.88,0) 2(1.88,0)
  silkscreen extent -0.33,-1.4 0.33,1.4, body extent -2.54,-1.27 2.54,1.27, height 0.89
JST-S2B-PH-K-S_V [mm] "THD, 2-Leads, Body 7.6x5.9mm, Pitch 2mm"
  rect 1.2x1.2 hole 0.7: 1(-1,2.45)
  round 1.2 hole 0.7: 2(1,2.45)
  silkscreen extent -2.95,-3.8 2.95,4.35, body extent -2.95,-3.8 2.95,3.8, height 4.8
ONSC-SOD-123-2-425-04_V [mm] "SOD, 2-Leads, Body 2.69x1.6mm"
  rect 0.91x1.22 smd: 1(-1.635,0) 2(1.635,0)
  silkscreen extent -1.76,-0.8 0.78,1.29, body extent -1.35,-0.8 1.35,0.8, height 1.35
ONSC-SOD-323-2-477-02_V [mm] "SOD, 2-Leads, Body 1.7x1.25mm"
  rect 0.63x0.83 smd: 1(-1.115,0) 2(1.115,0)
  silkscreen extent -1.24,-0.67 0.4,1.09, body extent -0.85,-0.63 0.85,0.63, height 1.06
RESC1608X55X25LL10T15 [mm] "Chip Resistor, 2-Leads, Body 1.60x0.80mm, IPC High Density"
  rect 0.6x0.8 smd: 1(-0.65,0) 2(0.65,0)
  body extent -0.85,-0.45 0.85,0.45, height 0.55
RESC1608X55X25ML10T15 [mm] "Chip Resistor, 2-Leads, Body 1.60x0.80mm, IPC Low Density"
  rect 0.8x1 smd: 1(-0.75,0) 2(0.75,0)
  body extent -0.85,-0.45 0.85,0.45, height 0.55
RESC1608X55X25NL10T15 [mm] "Chip Resistor, 2-Leads, Body 1.70x0.90mm, IPC Medium Density"
  rect 0.7x0.9 smd: 1(-0.7,0) 2(0.7,0)
  body extent -0.85,-0.45 0.85,0.45, height 0.55
SOT65P210X110-6N [mm]
  rect 1.2x0.4 smd: 1(-0.95,0.65) 2(-0.95,0) 3(-0.95,-0.65) 4(0.95,-0.65) 5(0.95,0) 6(0.95,0.65)
  silkscreen extent -1.55,1.2 -0.35,1.2, body extent -1.07,-1.05 1.07,1.05, height 0.95
UFQFPN-48_7X7X0P55MM [mil]
  rect 32x12 smd paste+0 mask+0: 1(-136,108.27) 2(-136,88.58) 3(-136,68.9) 4(-136,49.21) 5(-136,29.53) 6(-136,9.84) 7(-136,-9.84) 8(-136,-29.53) 9(-136,-49.21) 10(-136,-68.9) 11(-136,-88.58) 12(-136,-108.27) 25(136,-108.27) 26(136,-88.58) 27(136,-68.9) 28(136,-49.21) 29(136,-29.53) 30(136,-9.84) 31(136,9.84) 32(136,29.53) 33(136,49.21) 34(136,68.9) 35(136,88.58) 36(136,108.27)
  rect 12x32 smd paste+0 mask+0: 13(-108.27,-136) 14(-88.58,-136) 15(-68.9,-136) 16(-49.21,-136) 17(-29.53,-136) 18(-9.84,-136) 19(9.84,-136) 20(29.53,-136) 21(49.21,-136) 22(68.9,-136) 23(88.58,-136) 24(108.27,-136) 37(108.27,136) 38(88.58,136) 39(68.9,136) 40(49.21,136) 41(29.53,136) 42(9.84,136) 43(-9.84,136) 44(-29.53,136) 45(-49.21,136) 46(-68.9,136) 47(-88.58,136) 48(-108.27,136)
  rect 224x224 smd paste-112 mask+0: 49(0,0)
  silkscreen extent -172,-172 172,172, body extent -140,-140 140,140, height 24

## Part data
C1: library part CMP-06035-025734-1, "Chip Multilayer Ceramic Capacitors for General Purpose, 0402, 0.10uF, X7R, 15%, 20%, 25V"
C2 C4 C5 C27 C28: library part CMP-2006-03731-2, "CAP CER 0.1UF 25V X7R 0603", Capacitance="0.10 μF", Manufacturer=KEMET, Manufacturer Part Number=C0603C104K3RACAUTO, Package=C0603C-CF, Temperature="-55°C to +125°C", Temperature Characteristic=X7R, Temperature Coefficient=30ppm/°C, Temperature Range High=+125°C, Temperature Range Low=-55°C, Tolerance=0.1, Voltage Rating="25 V", Automotive=Yes, Automotive Grade="Grade 1", Category=Cap, ComponentLink2Description=Datasheet, ComponentLink2URL=https://api.kemet.com/component-edge/download/datasheet/C0603C100J5GACAUTO.pdf, Device Class L1="Passive Components", Device Class L2=Capacitors, Device Class L3="Ceramic Capacitors", Digikey Description="CAP CER 0.1UF 25V X7R 0603", Height=0.87mm, Lead Free=Yes, Material=Ceramic, Mouser Description="Multilayer Ceramic Capacitors MLCC - SMD/SMT 0.1uF 25volts 10% X7R AUTO", Octopart=https://octopart.com/c0603c104k3racauto-kemet-12595587, RoHS=TRUE
C3: library part CMP-06035-045467-1, "Chip Multilayer Ceramic Capacitors for General Purpose, 0603, 4.7uF, X7R, 15%, 10%, 16V"
C6: library part CMP-2006-02217-1, Manufacturer=Kemet, Part Number=C0603C105M3RACTU
C7: library part CMP-03020-015349-1, "C0603 10,000 pF C0G 30ppm/°C 5.00% 25 V", Capacitance="10,000 pF", Manufacturer=KEMET, Manufacturer Part Number=C0603C103J3GACAUTO, Package=C0603C-CF, Temperature="-55°C to +125°C", Temperature Characteristic=C0G, Temperature Coefficient=30ppm/°C, Temperature Range High=+125°C, Temperature Range Low=-55°C, Tolerance=0.05, Voltage Rating="25 V", Automotive=Yes, Automotive Grade="Grade 1", Category=Cap, ComponentLink2Description=Datasheet, ComponentLink2URL=https://api.kemet.com/component-edge/download/datasheet/C0603C100J5GACAUTO.pdf, Device Class L1="Passive Components", Device Class L2=Capacitors, Device Class L3="Ceramic Capacitors", Height=0.87mm, Lead Free=Yes, Material=Ceramic, Mouser Description="Cap Ceramic 0.01uF 25V C0G 5% Pad SMD 0603 125C Automotive T/R", Octopart=https://octopart.com/c0603c103j3gacauto-kemet-75532652, RoHS=TRUE
C8 C9 C10: library part CMP-2006-03716-2, "CAP CER 1000PF 50V X7R 0603", Capacitance="1,000 pF", Manufacturer=KEMET, Manufacturer Part Number=C0603C102K5RACAUTO, Package=C0603C-CF, Temperature="-55°C to +125°C", Temperature Characteristic=X7R, Temperature Coefficient=30ppm/°C, Temperature Range High=+125°C, Temperature Range Low=-55°C, Tolerance=0.1, Voltage Rating="50 V", Automotive=Yes, Automotive Grade="Grade 1", Category=Cap, ComponentLink2Description=Datasheet, ComponentLink2URL=https://api.kemet.com/component-edge/download/datasheet/C0603C100J5GACAUTO.pdf, Device Class L1="Passive Components", Device Class L2=Capacitors, Device Class L3="Ceramic Capacitors", Digikey Description="CAP CER 1000PF 50V X7R 0603", Height=0.87mm, Lead Free=Yes, Material=Ceramic, Mouser Description="Multilayer Ceramic Capacitors MLCC - SMD/SMT 1000pF 50volts 10% X7R AUTO", Octopart=https://octopart.com/c0603c102k5racauto-kemet-18822673, RoHS=TRUE
C11: library part CMP-06035-034802-1, "Multi-Layer Ceramic Capacitor 1uF 6.3V X7R ±10% 0402 Paper T/R"
C12 C16 C19 C23 C25 C26 C29: library part CMP-45632-000007-1, "CAP CER 0.1UF 50V X7R 0603", Capacitance=100nF, Case Code (Imperial)=0603, Case Code (Metric)=1608, Dielectric=X7R, Max Operating Temperature=125°C, Min Operating Temperature=-55°C, Tolerance=10%, Voltage Rating=50V, Case/Package=0603, Depth=0.8mm, Lead Free="Lead Free", Length=1.6mm, Packaging="Tape and Reel", Radiation Hardening=No, RoHS Compliant=Yes, Series=-, Voltage Rating (DC)=50V
C13: library part CMP-2007-03229-1, Manufacturer=Kemet, Part Number=C0805C105J4RACTU
C14: library part CMP-2006-03882-2, "CAP CER 0.047UF 25V 10% X7R 0603", Capacitance="47,000 pF", Manufacturer=KEMET, Manufacturer Part Number=C0603C473K3RACTU, Package=C0603C-CF, Temperature="-55°C to +125°C", Temperature Characteristic=X7R, Temperature Coefficient=30ppm/°C, Temperature Range High=+125°C, Temperature Range Low=-55°C, Tolerance=0.1, Voltage Rating="25 V", Automotive=Yes, Automotive Grade="Grade 1", Category=Cap, ComponentLink2Description=Datasheet, ComponentLink2URL=https://api.kemet.com/component-edge/download/datasheet/C0603C100J5GACAUTO.pdf, Device Class L1="Passive Components", Device Class L2=Capacitors, Device Class L3="Ceramic Capacitors", Digikey Description="CAP CER 0.047UF 25V 10% X7R 0603", Height=0.87mm, Lead Free=Yes, Material=Ceramic, Mouser Description="Multilayer Ceramic Capacitor, C Series, 0.047 - F, - 10%, X7R, 25 V, 0603 [1608 Metric] Rohs Compliant: Yes", Octopart=https://octopart.com/c0603c473k3ractu-kemet-3834514, RoHS=TRUE
C15: library part CMP-06035-004402-1, "Chip Multilayer Ceramic Capacitors for General Purpose, 0805, 10uF, X5R, 15%, 10%, 50V", Capacitance=10uF, Dielectric=X5R, Tolerance=10%, Voltage Rating (DC)=50V, Length=2mm, Thickness=1.25mm, Width=1.25mm
C18: library part CMP-06035-051066-1, "Chip Multilayer Ceramic Capacitors for General Purpose, 0805, 22uF, X7R, 15%, 20%, 10V"
C20 C24 C32: library part CMP-06035-012295-1, "Chip Multilayer Ceramic Capacitors for General Purpose, 0805, 4.7uF, X7R, 15%, 20%, 50V"
C30 C31: library part CMP-2000-06025-2, "Multilayer Ceramic Capacitors 1μF ±10% 50V X5R SMD 0603", Capacitance=1uF, Case Code (Imperial)=0603, Case Code (Metric)=1608, Dielectric=X5R, Dielectric Material=Ceramic, Max Operating Temperature=85°C, Min Operating Temperature=-55°C, Package Quantity=1, Tolerance=10%, Voltage=50V, Case/Package=0603, Construction=Flat, Depth=0.8mm, Height=0.8mm, Lead Free="Lead Free", Length=1.6mm, Mount="Surface Mount", Number of Pins=2, Packaging="Tape and Reel", Radiation Hardening=No, REACH SVHC="No SVHC", Resistor Type=Ceramic, RoHS Compliant=Yes, Series=C, Termination=SMD/SMT, Thickness=0.035inch, Voltage Rating=50V, Voltage Rating (DC)=50V, Weight=7.1E-05oz, Width=0.031inch
C33 C34 C35 C36 C37 C38 C39: library part CMP-06035-056600-1, "Chip Multilayer Ceramic Capacitors for General Purpose, 0805, 4.7uF, X7R, 15%, 10%, 50V"
D1: library part CMP-2000-05885-2, "DIODE SCHOTTKY 60V 1A SMA", Average Rectified Current=1A, Capacitance=110pF, Case/Package=SMA, Forward Voltage=700mV, Max Forward Surge Current (Ifsm)=30A, Max Operating Temperature=150°C, Max Repetitive Reverse Voltage (Vrrm)=60V, Min Operating Temperature=-65°C, Package Quantity=5000, Peak Reverse Current=500uA, Contact Plating=Tin, Current Rating=1A, Element Configuration=Single, Forward Current=1A, Height=2.1mm, Lead Free="Lead Free", Length=4.6mm, Max Reverse Voltage (DC)=60V, Mount="Surface Mount", Number of Pins=2, Output Current=1A, Packaging="Tape and Reel", Peak Non-Repetitive Surge Current=30A, Polarity=Standard, Radiation Hardening=No, REACH SVHC="No SVHC", Termination=SMD/SMT, Voltage Rating (DC)=60V, Weight=0.002258oz, Width=2.92mm
D2: library part CMP-00278-93203857-1, "NRVBSS16HE Rectifier Diode, Schottky, 1 Phase, 1 Element, 1A, 60V V(RRM), Silicon", Capacitance=43pF, Forward Current=1A, Manufacturer Lifecycle Status=ACTIVE, Max Forward Surge Current (Ifsm)=25A, Max Junction Temperature (Tj)=150°C, Max Repetitive Reverse Voltage (Vrrm)=60V, Min Operating Temperature=-55°C, Peak Reverse Current=2µA, Height=750µm, Lifecycle Status=Production, Max Operating Temperature=150°C, NexarPartId=93203857, Reverse Voltage=60V, RoHS=Compliant
D3: library part CMP-1055-00466-1, "Schottky Barrier Diode, 2-Pin SOD-323, Pb-Free, Tape and Reel", Manufacturer="On Semiconductor", ComponentLink1Description="Manufacturer URL", ComponentLink1URL=http://www.onsemi.com/, ComponentLink2Description=Datasheet, ComponentLink2URL=http://www.onsemi.cn/pub_link/Collateral/NSR0320MW2T1-D.PDF, ComponentLink3Description="Package Specification", ComponentLink3URL=http://www.onsemi.com/pub_link/Collateral/477-02.PDF.1, Configuration=Single, DatasheetVersion="Rev. 4", IFSM Max (A)=5, Mounting Technology="Surface Mount", PackageDescription="2-Pin SOD, Body 1.7 x 1.25 mm", PackageReference=SOD-323-2-477-02, PackageVersion="Rev. H, 03/2007", Packing="Tape and Reel", PartNumber=NSR0320MW2T1G, RoHS=TRUE
D4: library part CMP-11424-92175759-2, "PESD3V3Y1BSFYL PESD4V0Y1BSF - Extremely low capacitance bidirectional ESD protection diode", Ambient Temperature Range High=125°C, Breakdown Voltage=4.2V, Capacitance=240fF, Clamping Voltage=3.7V, Manufacturer Lifecycle Status="RELEASED FOR SUPPLY", Reverse Standoff Voltage=3.3V, Direction=Bidirectional, Height=320µm, Lifecycle Status=Production, NexarPartId=92175759, Number Of Channels=1, RoHS=Non-Compliant, Schedule B=8536300000
D5: library part CMP-1060-00574-1, "Zener Voltage Regulator, 500 mW, 2-Pin SOD-123, Pb-Free, Tape and Reel", Manufacturer="On Semiconductor", ComponentLink1Description="Manufacturer URL", ComponentLink1URL=http://www.onsemi.com/, ComponentLink2Description=Datasheet, ComponentLink2URL=http://www.onsemi.com/pub_link/Collateral/MMSZ4678T1-D.PDF, ComponentLink3Description="Package Specification", ComponentLink3URL=http://www.onsemi.com/pub_link/Collateral/425-04.PDF, DatasheetVersion="Rev. 9", Mounting Technology="Surface Mount", P Max (W)=0.5, PackageDescription="2-Pin SOD, Body 1.6 x 2.69 mm", PackageReference=SOD-123-2-425-04, PackageVersion="Rev. G, 10/2009", Packing="Tape and Reel", PartNumber=MMSZ4685T1G, RoHS=Pb-Free, VZ Typ (V)=3.6
F1: library part CMP-00227-00673855-1, "0805L010YR PTC Resettable Fuse 0.1A(hold) 0.3A(trip) 15VDC 100A 0.5W 1.5s 1Ohm SMD Solder Pad 0805 T/R", Ambient Temperature Range High=85°C, Case Code (Imperial)=0805, Case Code (Metric)=2012, Current Rating=100A, Hold Current=100mA, Max Power Dissipation=500mW, Max Voltage Rating (DC)=15V, Maximum Resistance 1 Hour (R1max)=6Ω, Min Operating Temperature=-40°C, Minimum Resistance Initial (Rmin)=1Ω, Approvals="TUV, cULus", Case/Package=0805, Height=1mm, Lead Free="Lead Free", Length=2.2mm, Lifecycle Status=Production, Max Current Rating=100A, Max Operating Temperature=85°C, Mount="Surface Mount", NexarPartId=673855, Operating Supply Voltage=15V, Packaging="Cut Tape", Power Dissipation=500mW, REACH SVHC="No SVHC", Resistance=6Ω, RoHS=Compliant, Terminal Material=Copper, Termination=SMD/SMT, Time to Trip=1.5s, Trip Current=300mA, Voltage Rating=15V, Voltage Rating (DC)=15V, Width=1.5mm, Working Voltage=15V
FB1: library part CMP-08257-000179-1, "Power line Ferrite Bead 600Ω @ 100MHz 1A DCR 0.15Ω SMD 0603", Case Code (Imperial)=0603, Case Code (Metric)=1608, Current Rating=1A, DC Resistance (DCR)=150mR, Max Operating Temperature=125°C, Min Operating Temperature=-55°C, Package Quantity=4000, Test Frequency=100MHz, Tolerance=25%, Case/Package=0603, Core Material=Ferrite, Depth=0.8mm, Height=0.8mm, Impedance=600R, Lead Free="Lead Free", Length=0.063inch, Max DC Current=1A, Mount="Surface Mount", Packaging="Tape and Reel", REACH SVHC="No SVHC", RoHS Compliant=Yes, Series=MPZ, Termination=SMD/SMT, Weight=7.1E-05oz, Width=0.8mm
IC1: "Integrated Circuit", Manufacturer_Name=Nexperia, Mouser Part Number=771-74LVC1G3157GWQ10, Arrow Part Number=74LVC1G3157GW-Q10H, Arrow Price/Stock=https://www.arrow.com/en/products/74lvc1g3157gw-q10h/nexperia?utm_currency=USD&region=nac, Datasheet Link=https://assets.nexperia.com/documents/data-sheet/74LVC1G3157_Q100.pdf, Height=1.1mm, Manufacturer_Part_Number=74LVC1G3157GW-Q10H, Mouser Price/Stock=https://www.mouser.co.uk/ProductDetail/Nexperia/74LVC1G3157GW-Q10H?qs=5XOdhvmYM0OEi4hrMRn80A%3D%3D
J2: library part CMP-04767-000026-1, "CONN RCP USB2.0 C 6+18P SMD RA"
J3: library part CMP-02766-001414-1, "CONN HEADER SMD 14POS 1.27MM", Contact Material=Bronze, Contact Plating=Gold, Gender=Male, Lead Free="Lead Free", Number Of Contacts=14, Number of Rows=2, Pitch=1.27mm, RoHS Compliant=Yes, Termination=Solder
J4: library part CMP-17439-000250-1, "CONN HEADER VERT 4POS 2.5MM", Color=Natural, Contact Resistance=20mR, Current Rating=3A, Flammability Rating="UL94 V-0", Housing Color=White, Insulation Resistance=1GR, Max Operating Temperature=85°C, Max Voltage Rating (AC)=250V, Min Operating Temperature=-25°C, Package Quantity=500, Connector Type=Header, Contact Finish - Mating=TIN, Contact Material=Brass, Contact Plating=Tin, Contact Shape=Square, Contact Type="Male Pin", Depth=5.75mm, Fastening Type=Detent, Gender=Male, Housing Material=Polyamide, Insulation Color=Natural, Insulation Material=Nylon, Lead Free="Lead Free", Lead Pitch=2.5mm, Length=12.4mm, Mated Stacking Heights=9.8mm, Material=Polyamide, Max Current Rating=3A, Max Voltage Rating (DC)=250V, Mount="Through Hole", Number Of Contacts=4, Number of Positions=4, Number of Rows=1, Orientation=Straight, Packaging=Bulk, Pitch=2.5mm, REACH SVHC="No SVHC", Series=XH, Termination=Solder, Voltage Rating=250V, Voltage Rating (AC)=250V, Wire/Cable Gauge=22AWG
L1: library part CMP-06042-012393-1, "Wire Wound Ferrite Inductor for Power Lines 22μH ±20% 0.132Ω 1500mA 2020 / LQH5BPN220M38L"
LED1: library part CMP-00030-21709200-1, "VLMO1300-GS08 LED Uni-Color Soft Orange 611nm 2-Pin Chip 0603(1608Metric) T/R", Ambient Temperature Range High=85°C, Case Code (Imperial)=0603, Case Code (Metric)=1608, Color=Orange, Forward Current=20mA, Forward Voltage=2V, Min Operating Temperature=-35°C, Power Dissipation=75mW, Reverse Voltage=5V, Case/Package=0603, Depth=800µm, Dominant Wavelength=605nm, Height=800µm, Illumination Color=Orange, Lead Free="Lead Free", Length=1.6mm, Lens Style="Clear, Rectangular", Luminous Intensity=90mcd, Max Operating Temperature=85°C, Mount="Surface Mount", NexarPartId=21709200, Number of Elements=1, Number of LEDs=1, Number of Pins=2, Packaging="Cut Tape", Power Rating=75mW, Radiation Hardening=No, REACH SVHC=Unknown, RoHS=Compliant, Schedule B="8541402000, 8541402000", Test Current=20mA, Viewing Angle=130°, Wavelength=605nm, Width=800µm
LED2: library part CMP-2000-06622-2, "LED GREEN CLEAR CHIP SMD", Case Code (Imperial)=0603, Case Code (Metric)=1608, Color=Green, Forward Current=30mA, Forward Voltage=2.3V, Lens Color=Colorless, Max Operating Temperature=85°C, Min Operating Temperature=-55°C, Package Quantity=3000, Power Dissipation=75mW, Reverse Voltage=5V, Test Current=5mA, Case/Package=0603, Depth=0.8mm, Dominant Wavelength=576.5nm, Height=0.35mm, Illumination Color=Green, Lead Free="Lead Free", Length=1.6mm, Lens Style=Diffused, Lens Transparency=Clear, Luminous Intensity=28mcd, Mount="Surface Mount", Number of Elements=1, Number of LEDs=1, Number of Pins=2, Packaging="Tape and Reel", Power Rating=75mW, Radiation Hardening=No, Viewing Angle=130°, Width=0.8mm
LED3: library part CMP-2000-05788-2, "LED BLUE CLEAR CHIP SMD", Case Code (Imperial)=0603, Case Code (Metric)=1608, Color=Blue, Forward Current=20mA, Forward Voltage=3.3V, Lens Color=Colorless, Max Operating Temperature=85°C, Min Operating Temperature=-40°C, Package Quantity=2000, Case/Package=0603, Dominant Wavelength=465nm, Height=0.75mm, Illumination Color=Blue, Lead Free="Lead Free", Length=1.6mm, Lens Style=Flat, Lens Transparency=Clear, Luminous Intensity=100mcd, Mount="Surface Mount", Number of LEDs=1, Number of Pins=2, Packaging="Tape and Reel", Test Current=20mA, Viewing Angle=120°, Width=0.8mm
P1: library part CMP-1755-00004-1, "Male Header, Pitch 2 mm, 1 x 2 Position, Height 4.8 mm, Tail Length 3.4 mm, -25 to 85 degC, RoHS, Bulk", Capacitance="10 uF", Case\Package=Radial, Max Operating Temperature="85 degC", Min Operating Temperature="-40 degC", Package Quantity=200, Tolerance=20%, Voltage Rating="50 V", ComponentLink1Description=Datasheet, ComponentLink1URL=http://www.jst-mfg.com/product/pdf/eng/ePH.pdf, DatasheetVersion=Dec-12, Diameter="5 mm", Height="11 mm", Lead Pitch="2 mm", Length="11 mm", Mount="Through Hole", PackageDescription="Male Header, Pitch 2 mm, 1 x 2 Position, Height 4.8 mm, Tail Length 3.4 mm", PackageReference=S2B-PH-K-S, Packaging=Bulk, Pins=2, Radiation Hardening=No, REACH SVHC="No SVHC", RoHSCompliant=true, Voltage Rating (DC)="50 V"
Q1 Q2 Q3 Q4 Q5 Q6: "MOSFET (N-Channel)", Manufacturer_Name=STMicroelectronics, Mouser Part Number=511-STL130N6F7, Arrow Part Number=STL130N6F7, Arrow Price/Stock=https://www.arrow.com/en/products/stl130n6f7/stmicroelectronics?utm_currency=USD&region=nac, Datasheet Link=https://www.st.com/resource/en/datasheet/stl130n6f7.pdf, Height=1mm, Manufacturer_Part_Number=STL130N6F7, Mouser Price/Stock=https://www.mouser.co.uk/ProductDetail/STMicroelectronics/STL130N6F7?qs=bKenfurwlsn66DUeXqgWIw%3D%3D
R1 R2 R3: library part CMP-03412-039929-1, "RES 330Ω 5.00% 0.1W 0603", Case Code (Imperial)=0603, Case Code (Metric)=1608, Max Operating Temperature=155°C, Max Power Dissipation=100mW, Min Operating Temperature=-55°C, Ratings=AEC-Q200, Resistance=330R, Resistor Type="Thick Film", Temperature Coefficient=100ppm/°C, Tolerance=5%, Voltage Rating=50V, Case/Package=0603, Features="Moisture Resistant", Height=0.45mm, Length=1.6mm, Number of Terminations=2, Packaging="Tape and Reel", Power Rating=100mW, RoHS Compliant=Yes, Series=AC, Termination=SMD/SMT, Weight=7.1E-05oz, Width=0.8mm
R4: library part CMP-02407-001385-1, "RES SMD 100 OHM 1% 1/8W 0603", Case Code (Imperial)=0603, Case Code (Metric)=1608, Max Operating Temperature=125°C, Max Power Dissipation=125mW, Min Operating Temperature=-55°C, Package Quantity=1, Power Rating=100mW, Resistance=0mR, Voltage Rating=75V, Case/Package=0603, Composition="Thin Film", Contact Plating=Tin, Depth=0.85mm, Height=0.022inch, Lead Free="Lead Free", Length=1.55mm, Military Standard=Not, Mount="Surface Mount", Number of Terminations=2, Packaging="Tape and Reel", Radiation Hardening=No, REACH SVHC="No SVHC", Voltage Rating (DC)=75V, Width=0.033inch
R5: library part CMP-03412-024663-2, "RES 220Ω 1.00% 0.1W 0603", Case Code (Imperial)=0603, Case Code (Metric)=1608, Max Operating Temperature=155°C, Max Power Dissipation=100mW, Min Operating Temperature=-55°C, Ratings=AEC-Q200, Resistance=220R, Resistor Type="Thick Film", Temperature Coefficient=100ppm/°C, Tolerance=1%, Voltage Rating=50V, Case/Package=0603, Features="Moisture Resistant", Height=0.45mm, Length=1.6mm, Number of Terminations=2, Packaging="Tape and Reel", Power Rating=100mW, RoHS Compliant=Yes, Series=AC, Termination=SMD/SMT, Width=0.8mm
R6 R7 R8 R16: library part CMP-2000-04173-1, Manufacturer=Yageo, Part Number=RC0603FR-10100RL
R9 R11: library part CMP-2000-04303-1, Manufacturer=Yageo, Part Number=RC0603JR-1010KL
R10: library part CMP-2000-04193-1, Manufacturer=Yageo, Part Number=RC0603FR-13100KL
R12: library part CMP-1659-00059-1, "Chip Resistor, 33.2 KOhm, +/- 1%, 100 mW, -55 to 155 degC, 0603 (1608 Metric), RoHS, Tape and Reel", Capacitance="1.8E-11 f", Case/Package=CSMD, Frequency="12 MHz", Frequency Tolerance=20ppm, Load Capacitance="18 pF", Max Operating Temperature=70degC, Min Operating Temperature=-20degC, Package Quantity=1000, Resistance="70 Ohm", ComponentLink1Description="Manufacturer URL", ComponentLink1URL=http://www.yageo.com/, ComponentLink2Description=Datasheet, ComponentLink2URL=http://www.yageo.com/documents/recent/PYu-RC_Group_51_RoHS_L_04.pdf, DatasheetVersion="Rev. 4, 02/2016", ESR="70 Ohm", Height="0.043 inch", Length="0.197 inch", Mount="Surface Mount", PackageDescription="2-Pin Surface Mount Device, Body 1.6 x 0.8 mm", PackageReference=0603, Packaging="Tape and Reel", Pins=4, Radiation Hardening=No, REACH SVHC="No SVHC", RoHSCompliant=True, Tolerance=20ppm, Width="0.126 inch"
R13: library part CMP-03412-009989-1, "RES SMD 10K OHM 0.1% 1/10W 0603", Manufacturer=Yageo, Manufacturer Part Number=RT0603BRC0710KL, Package=RT0603, Power Rating=0.1W, Resistance=10KΩ, Temperature="-55°C to +155°C", Temperature Coefficient="15 ppm/°C", Temperature Range High=+155°C, Temperature Range Low=-55°C, Tolerance=0.001, Voltage Rating=75V, Automotive=No, Category=Res, ComponentLink2Description=Datasheet, ComponentLink2URL=http://www.yageo.com/documents/recent/PYu-RT_1-to-0.01_RoHS_L_9.pdf, Composition="Thin Film", Device Class L1="Passive Components", Device Class L2=Resistors, Device Class L3="Chip SMD Resistors", Digikey Description="RES SMD 10K OHM 0.1% 1/10W 0603", Footprint Url=http://www.yageo.com/exep/pages/download/literatures/PYu-R_Mount_10.pdf, Height=0.55mm, Ipc Land Pattern Name=RESC16080X45, Lead Free=Yes, Mouser Description="Res Thin Film 0603 10K Ohm 0.1% 1/10W ±15ppm/°C Molded SMD Paper T/R", Octopart=https://octopart.com/rt0603brc0710kl-yageo-20648660, RoHS=TRUE, Series=RT
R14 R18: library part CMP-03412-040683-1, "RES 10kΩ 5.00% 0.2W 0603"
R15: library part CMP-2000-05271-3, "NTC Thermistor for Temperature Sensor, 0603, 10kΩ, 1%, 0.1mA, 5V", Case Code (Imperial)=0603, Case Code (Metric)=1608, Current Rating=310uA, Manufacturer Series=NCP18, Max Operating Temperature=125°C, Max Power Dissipation=100mW, Min Operating Temperature=-40°C, Package Quantity=1, Package Shape=Rectangular, Resistance=10kR, Resistance Tolerance=1%, Accuracy=0.7%, Case/Package=0603, Depth=0.8mm, Height=0.8mm, Lead Free="Lead Free", Length=1.6mm, Mount="Surface Mount", Number of Pins=2, Number of Terminals/Pins=2, Packaging="Tape and Reel", Power Rating=100mW, Radiation Hardening=No, REACH SVHC="No SVHC", RoHS Compliant=Yes, Series=NCP, Terminal Finish=Tin, Terminal Placement=Dual, Termination=SMD/SMT, Thermistor Application="TEMPERATURE COMPENSATION", Tolerance=1%
R17: library part CMP-03211-001392-1, "SMD Precision Pulse Thick Film Chip Resistor", Manufacturer=TE, Manufacturer Part Number=CRGP0402F100K, Package=CRGP0402, Power Rating=0.125W, Resistance=100KΩ, Temperature="-55°C to +155°C", Temperature Coefficient=±100ppm/°C, Temperature Range High=+155°C, Temperature Range Low=-55°C, Tolerance=0.01, Voltage Rating=50V, Automotive=No, Category=Res, ComponentLink2Description=Datasheet, ComponentLink2URL=https://www.mouser.ca/datasheet/2/418/NG_DS_9-1773463-9_A-1358566.pdf, Composition="Thick Film", Device Class L1="Passive Components", Device Class L2=Resistors, Device Class L3="Chip SMD Resistors", Digikey Description="SMD Precision Pulse Thick Film Chip Resistor", Height=0.4mm, Ipc Land Pattern Name=RESC11050X35, Lead Free=Yes, Octopart=https://octopart.com/crgp0402f100k-te+connectivity-91018658, RoHS=TRUE, Series=CRGP
R19 R20 R21: library part CMP-00030-39744854-1, "WSL20101L000FEA18 Res Metal Strip 2010 0.001 Ohm 1% 1W ±275ppm/C Sulfur Resistant Pad SMD Automotive T/R", Case Code (Imperial)=2010, Case Code (Metric)=5025, Max Operating Temperature=170°C, Max Power Dissipation=1W, Min Operating Temperature=-65°C, Power Rating=500mW, Resistance=1mΩ, Temperature Coefficient=275ppm/°C, Tolerance=1%, Case/Package=2010, Composition="Metal Element, Metal Strip", Contact Plating=Tin, Depth=2.54mm, Features="Moisture Resistant", Height=635µm, Lead Free="Lead Free", Length=5.08mm, Mount="Surface Mount", NexarPartId=39744854, Number of Pins=2010, Number of Terminations=2, Packaging="Cut Tape", Radiation Hardening=No, REACH SVHC=Unknown, RoHS=Compliant, Schedule B="8533210045, 8533210045", Termination=SMD/SMT, Width=2.54mm
R22 R23 R24 R28 R29 R30: library part CMP-03412-013434-1, "RT0603 100KΩ 0.1W 50 ppm/°C 1.00%", Manufacturer=Yageo, Manufacturer Part Number=RT0603FRE13100KL, Package=RT0603, Power Rating=0.1W, Resistance=100KΩ, Temperature="-55°C to +155°C", Temperature Coefficient="50 ppm/°C", Temperature Range High=+155°C, Temperature Range Low=-55°C, Tolerance=0.01, Voltage Rating=75V, Automotive=No, Category=Res, ComponentLink2Description=Datasheet, ComponentLink2URL=http://www.yageo.com/documents/recent/PYu-RT_1-to-0.01_RoHS_L_9.pdf, Composition="Thin Film", Device Class L1="Passive Components", Device Class L2=Resistors, Device Class L3="Chip SMD Resistors", Footprint Url=http://www.yageo.com/exep/pages/download/literatures/PYu-R_Mount_10.pdf, Height=0.55mm, Ipc Land Pattern Name=RESC16080X45, Lead Free=Yes, Mouser Description="Thin Film Resistors - SMD 1/10W 100K ohm 1% 50ppm", Octopart=https://octopart.com/rt0603fre13100kl-yageo-16261755, RoHS=TRUE, Series=RT
R25 R26 R27: library part CMP-02407-001600-1, "RES SMD 100 OHM 1% 1/8W 0603", Case/Package=0603, Max Operating Temperature=125°C, Max Power Dissipation=100mW, Min Operating Temperature=-55°C, Resistance=10kR, Temperature Coefficient=50ppm/°C, Tolerance=1%, Composition="Thin Film", Depth=0.85mm, Height=0.022inch, Lead Free="Lead Free", Length=0.061inch, Military Standard=Not, Number of Terminations=2, Packaging="Tape and Reel", Width=0.033inch
R31: library part CMP-03412-006948-1, "RES SMD 120 OHM 0.1% 1/10W 0603", Manufacturer=Yageo, Manufacturer Part Number=RT0603BRC07120RL, Package=RT0603, Power Rating=0.1W, Resistance=120Ω, Temperature="-55°C to +155°C", Temperature Coefficient="15 ppm/°C", Temperature Range High=+155°C, Temperature Range Low=-55°C, Tolerance=0.001, Voltage Rating=75V, Automotive=No, Category=Res, ComponentLink2Description=Datasheet, ComponentLink2URL=http://www.yageo.com/documents/recent/PYu-RT_1-to-0.01_RoHS_L_9.pdf, Composition="Thin Film", Device Class L1="Passive Components", Device Class L2=Resistors, Device Class L3="Chip SMD Resistors", Digikey Description="RES SMD 120 OHM 0.1% 1/10W 0603", Footprint Url=http://www.yageo.com/exep/pages/download/literatures/PYu-R_Mount_10.pdf, Height=0.55mm, Ipc Land Pattern Name=RESC16080X45, Lead Free=Yes, Octopart=https://octopart.com/rt0603brc07120rl-yageo-56543448, RoHS=TRUE, Series=RT
R32 R33: library part CMP-04015-008529-1, "5.1kΩ ±1% 0.063W, 1/16W Chip Resistor 0402 (1005 Metric) Moisture Resistant Thin Film"
U1: "Mainstream Arm Cortex-M4 MCU 170 MHz with 128 Kbytes of Flash memory, Math Accelerator, Medium Analog level integration", Manufacturer_Name=STMicroelectronics, Copyright="Copyright (C) 2025 Ultra Librarian. All rights reserved.", Datasheet=https://www.st.com/resource/en/datasheet/stm32g431c6.pdf, Manufacturer_Part_Number=STM32G431CBU6, RefDes=RefDes, Type=Type
U2: library part CMP-04915-000002-1, "IC MTR DRV MULTIPHAS 6-60V 48QFN", Ambient Temperature Range High=+125°C, Ambient Temperature Range Low=-40°C, Manufacturer="Texas Instruments", Max Junction Temp=+150°C, Max Supply Voltage=60V, Min Supply Voltage=4V, Nominal Supply Current=10.5mA, Output Current=5mA, Package=RGZ0048A, Switching Frequency=700kHz, Temperature="-40°C to +125°C", Automotive=No, Category=IC, ComponentLink2Description=Datasheet, ComponentLink2URL=http://www.ti.com/lit/ds/symlink/drv8323r.pdf, Device Class L1="Integrated Circuits (ICs)", Device Class L2="Power Management ICs", Device Class L3="Motor Drivers", Digikey Description="IC MTR DRV MULTIPHAS 6-60V 48QFN", Height=1mm, Lead Free=Yes, Manufacturer Part Number=DRV8323RSRGZR, Motor Type="Brushless DC", Mouser Description="Triple Half Bridge Motor Driver 48-Pin VQFN EP T/R", Octopart=https://octopart.com/drv8323rsrgzr-texas+instruments-80665177, RoHS=TRUE, Standoff Height=0mm, Temperature Range High=+125°C, Temperature Range Low=-40°C